# Altium PCB MEGA2560_Rev3e.PcbDoc (part 2 of 2)
Units mil, origin at the board's own origin, x right, y up, seen from the top; angles counter-clockwise.
Board outline 4000 x 2100 mil, 2 copper layers (Top, Bottom); 60 components, 84 nets, 364 pads, 139 vias.
Unrouted connection lines stored in the file: 1.
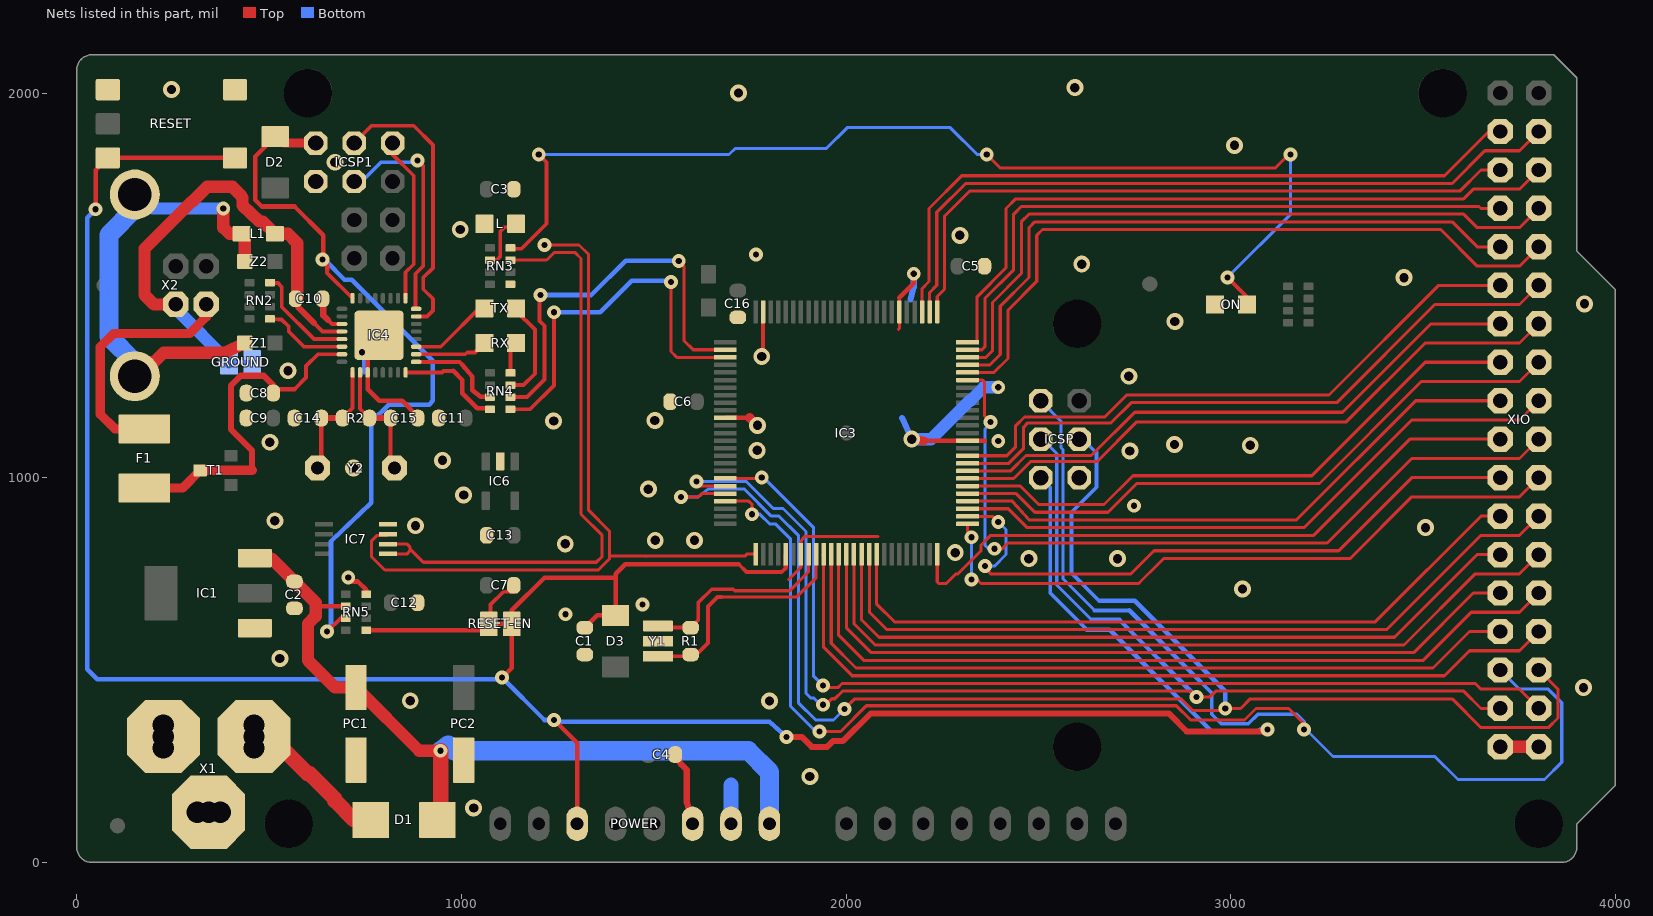
[diagram p2: the nets of this part, all layers, seen from the top]

## Via types
v1: diameter 36/36 (per signal layer), hole 16, Top to Bottom, 93 vias
v2: diameter 44/44 (per signal layer), hole 24, Top to Bottom, 46 vias

## Nets (pads, with @x,y where several pads share a name; then routed paths per layer and width w, separated by ;. In a path a pad name is that pad's centre, name@x,y a point inside that pad or via, vN(x,y) a via of type N, cw(c..) or ccw(c..) an arc to the next point about the centre after c; other vN are vias at no path point) (continued)
GND: C1.2 C2.2 C3.2 C4.2 C5.2 C6.2 C8.2 C9.2 C11.1 C12.1 C13.1 C14.2 C15.2 C16.2 GROUND.2 IC1.1 IC3.11 IC3.32 IC3.62 IC3.81 IC3.99 IC4.3 IC4.33 IC6.2 IC7.4 ICSP1.6 ICSP.6 L.C ON.C PC1.- PC2.- POWER.6 POWER.7 RESET.1 RESET.2 RN3.5 RN5.4 X1.1 X1.3 XIO.35 XIO.36 Y1.2 | length 2341.4
  Top w8: 1851.01,735.5 1883.01,767.5 IC3.32@1883.01,801.65 ; IC3.32@1882.9,801.54 IC3.32@1883.01,801.65 ; 2083.01,847.5 1892.01,847.5 1883.01,836.5 IC3.32@1883.01,801.65 ; 2136.01,1385.5 2138.81,1388.3 IC3.81@2138.81,1431.46 IC3.81@2140.05,1431.46 ; IC3.81@2137.01,1432.5 IC3.81@2140.05,1431.46 ; 2138.81,1468.3 2138.81,1432.7 IC3.81@2140.05,1431.46
  Top w10: v2(1781.01,1315.5) 1784.53,1319.02 1784.53,1365.46
  Top w11: IC4.33@756.41,1312.5 756.41,1313.9 756.51,1314 IC4.3@756.51,1272 ; 756.48,1230.03 IC4.3@756.48,1274.04 ; IC3.11@1686.05,1155.87 1686.05,1156 IC3.11@1688.38,1156 ; IC3.11@1688.38,1155.87 IC3.11@1688.38,1156 ; 1746.01,1156 IC3.11@1688.38,1156 ; IC3.99@1784.47,1431.46 1784.49,1407.43 1784.53,1365.46 ; 2209.01,1096.5 IC3.62@2316.29,1096.5 ; IC3.62@2317.01,1096.5 2316.7,1096.82 IC3.62@2315.97,1096.81 IC3.62@2316.29,1096.5 ; 2360.01,1096.5 IC3.62@2316.29,1096.5
  Top w12: IC1.1@463.01,609.5 IC1.1@466.01,610.5 ; v1(706.01,740.5) 716.01,730.5 731.01,730.5 752.58,708.93 RN5.4@752.58,697.74 ; IC4.33@756.41,1312.5 v1(742.01,1326.5) ; 756.48,1230.03 786.01,1200.5 846.01,1200.5 886.01,1160.5 C15.2@886.01,1155.5 ; IC4.33@756.48,1312.03 v1(742.01,1326.5) ; IC4.33@758.25,1326.5 v1(742.01,1326.5) ; IC4.33@786.01,1370.5 786.01,1312.5 v1(742.01,1326.5) ; 1749.01,1156.5 1746.01,1156 1747.01,1156.5 1750.01,1156.5 ; 2138.81,1468.3 2176.01,1505.5 v1(2176.01,1530.5) ; 2208.01,1097.5 2209.01,1096.5 ; 2360.01,1096.5 2361.01,1095.5
  Top w16: C4.2@1556.01,280.5 1571.01,255.5 1586.01,240.5 1586.01,155.5 POWER.6@1601.01,100.5 ; v2(2171.01,1100.5) 2206.01,1095.5 2208.01,1097.5
  Top w24: 1750.01,1156.5 v2(1770.01,1136.5) ; v2(2171.01,1100.5) 2201.01,1095.5
  Top w32: XIO.35@3701.01,300.5 XIO.36@3801.01,300.5
  Bottom w11: v1@747.01,1314.5 747.01,1274.5 757.01,1273.4 756.41,1273.4
  Bottom w12: 401.01,1300.5 GROUND.2@456.01,1300.5
  Bottom w16: v2(1770.01,1136.5) v2@1776.01,1145.5 ; 2146.01,1155.5 v2(2171.01,1100.5) ; 2168.01,1463.5 2176.01,1495.5 v1(2176.01,1530.5)
  Bottom w32: v2(2171.01,1100.5) 2221.01,1100.5 2321.01,1200.5 2323.01,1200.5 2358.01,1235.5 v1(2396.01,1235.5) ; XIO.35@3691.01,310.5 XIO.35@3701.01,300.5
  Bottom w40: POWER.7@1701.01,100.5 1701.01,200.5
  other v1: 1271.01,645.5 1471.01,670.5 2749.01,927.5 2396.01,1095.5 1766.01,1580.5
  other v2: 1032.01,141.5 1906.01,223.61 867.01,420.5 1801.01,419.61 3917.38,454.5 528.01,530.5 3031.01,710.82 2475.33,789.9 2705.55,789.9 2284.01,805.5 1270.01,828.5 1504.01,837.5 1606.01,837.5 3507.01,870.5 881.01,875.5 515.01,888.5 1006.01,955.5 1486.01,970.5 720.01,1025.5 951.01,1045.5 2738.01,1069.5 1769.01,1071.5 3051.01,1084.5 2854.01,1086.5 502.01,1092.5 1240.01,1147.5 1503.01,1149.13 2735.36,1264.18 549.01,1278.5 2855.01,1406.5 3920.38,1452.5 3451.01,1520.5 2613.01,1555.5 2296.01,1630.5 997.01,1645.5 671.01,1820.5 3010.01,1864.5 1720.38,2000.5 246.01,2009.5 2595.01,2014.5
L13: IC7.1 IC7.2 RN3.7 | length 1646.8
  Top w8: IC7.1@809.2,802.07 859.44,802.07 866.01,810.5 866.01,815.5 ; IC7.2@809.2,827.67 858.84,827.67 866.01,820.5 866.01,815.5 ; RN3.7@1127.58,1566.25 1221.76,1566.25 1241.01,1585.5 1296.01,1585.5 1311.01,1570.5 1311.01,905.5 1366.01,850.5 1366.01,795.5 1351.01,780.5 901.01,780.5 866.01,815.5
M8RXD: IC4.9 RN4.7 | length 250.9
  Top w10: IC4.9@882.47,1301.6 994.91,1301.6 1001.01,1295.5 ; RN4.7@1073.69,1210.5 RN4.7@1074.44,1209.75
  Top w12: 1001.01,1295.5 1028.14,1263.37 1028.14,1228.37 1051.01,1210.5 RN4.7@1073.69,1210.5
M8TXD: IC4.8 RN4.8 | length 282.9
  Top w10: IC4.8@854.91,1274.04 949.66,1274.04 953.56,1277.95 978.56,1277.95
  Top w12: 978.56,1277.95 1002.07,1254.44 1002.07,1219.44 1041.01,1180.5 1072.19,1180.5 RN4.8@1074.44,1178.26
MISO2: IC4.17 ICSP1.1 | length 435.1
  Top w10: ICSP1.1@821.01,1870.5 821.01,1840.5 876.01,1785.5 876.01,1555.5 854.91,1534.4 IC4.17@854.91,1466.96
MOSI2: IC4.16 ICSP1.4 | length 588.7
  Top w10: IC4.16@882.47,1439.4 882.47,1441.96 881.01,1445.5 881.01,1530.5 901.01,1550.5 901.01,1810.5 v1(886.01,1825.5)
  Bottom w10: ICSP1.4@721.01,1770.5 741.01,1770.5 791.01,1820.5 876.01,1820.5 881.01,1825.5 v1(886.01,1825.5)
NetL_A: L.A RN3.2 | length 141.7
  Top w10: RN3.2@1074.44,1566.25 1093.77,1568.26 1101.01,1575.5 1101.01,1640.5 1111.01,1650.5 L.A@1142.35,1660.5
NetON_A: ON.A RN3.8 | length 2829.5
  Top w8: v1(2366.01,1840.5) 2401.01,1805.5 3116.01,1805.5 3151.01,1840.5 v1(3156.01,1840.5) ; ON.A@3041.01,1460.5 ON.A@3042.35,1450.5
  Top w10: RN3.8@1127.58,1597.74 1138.33,1595.5 1156.01,1595.5 1221.01,1660.5 1221.01,1820.5 v1(1201.01,1840.5) ; v1(2991.64,1521.13) 3041.01,1471.76 ON.A@3041.01,1460.5
  Bottom w8: v1(1201.01,1840.5) 1696.01,1840.5 1712.01,1856.5 1949.01,1856.5 2003.01,1910.5 2271.01,1910.5 2341.01,1840.5 v1(2366.01,1840.5) ; v1(2991.64,1521.13) 3156.01,1685.5 v1(3156.01,1840.5)
NetRN4_3: RN4.3 TX.A | length 265.7
  Top w10: RN4.3@1127.58,1241.25 1161.76,1241.25 1191.01,1270.5 1191.01,1385.5 1142.35,1434.16 TX.A@1142.35,1440.5
NetRN4_4: RN4.4 RX.A | length 82.9
  Top w10: RN4.4@1127.58,1272.74 1127.58,1332.07 RX.A@1142.35,1350.5
PA0: IC3.78 XIO.3 | length 1844.4
  Top w8: IC3.78@2197.86,1431.46 2197.86,1492.35 2216.01,1510.5 2216.01,1700.5 2301.01,1785.5 3556.01,1785.5 3671.01,1900.5 XIO.3@3701.01,1900.5
PA1: IC3.77 XIO.4 | length 1918.7
  Top w8: IC3.77@2217.55,1431.46 2217.55,1482.04 2236.01,1500.5 2236.01,1690.5 2311.01,1765.5 3576.01,1765.5 3661.01,1850.5 3751.01,1850.5 XIO.4@3801.01,1900.5
PA2: IC3.76 XIO.5 | length 1751.5
  Top w8: IC3.76@2237.23,1431.46 2237.23,1471.72 2256.01,1490.5 2256.01,1680.5 2321.01,1745.5 3596.01,1745.5 3651.01,1800.5 XIO.5@3701.01,1800.5
PA3: IC3.75 XIO.6 | length 1829.6
  Top w8: IC3.75@2315.97,1352.72 2340.23,1352.72 2341.01,1359.5 2341.01,1471.13 2416.01,1546.13 2416.01,1700.5 2441.01,1725.5 3606.01,1725.5 3631.01,1750.5 3751.01,1750.5 XIO.6@3801.01,1800.5
PA4: IC3.74 XIO.7 | length 1699.6
  Top w8: IC3.74@2315.97,1333.04 2353.55,1333.04 2361.01,1340.5 2361.01,1466.13 2436.01,1541.13 2436.01,1685.5 2456.01,1705.5 3646.01,1705.5 3651.01,1700.5 XIO.7@3701.01,1700.5
PA5: IC3.73 XIO.8 | length 1826.7
  Top w8: IC3.73@2315.97,1313.35 2363.86,1313.35 2381.01,1330.5 2381.01,1456.13 2456.01,1531.13 2456.01,1665.5 2476.01,1685.5 3606.01,1685.5 3641.01,1650.5 3751.01,1650.5 XIO.8@3801.01,1700.5
PA6: IC3.72 XIO.9 | length 1715.4
  Top w8: IC3.72@2315.97,1293.67 2374.18,1293.67 2401.01,1320.5 2401.01,1446.13 2476.01,1521.13 2476.01,1650.5 2491.01,1665.5 3576.01,1665.5 3641.01,1600.5 XIO.9@3701.01,1600.5
PA7: IC3.71 XIO.10 | length 1842.5
  Top w8: IC3.71@2315.97,1273.98 2384.49,1273.98 2421.01,1310.5 2421.01,1436.13 2496.01,1511.13 2496.01,1630.5 2511.01,1645.5 3546.01,1645.5 3641.01,1550.5 3751.01,1550.5 XIO.10@3801.01,1600.5
PB0: IC3.19 XIO.34 | length 2613.4
  Top w8: IC3.19@1686.05,998.39 1788.12,998.39 v1(1781.01,1000.5) ; v1(1940,460) 1945.36,454.64 1978.94,454.64 1989.8,465.5 3636.01,465.5 3651.01,450.5 3751.01,450.5 XIO.34@3801.01,400.5
  Bottom w8: v1(1781.01,1000.5) 1786.01,1000.5 1916.01,870.5 1916.01,483.99 v1(1940,460)
PB1: IC3.20 ICSP.3 XIO.33 | length 3585.7
  Top w8: v1(1611.01,990.5) 1622.81,978.7 IC3.20@1686.05,978.7 ; v1(1940,410) 1947.58,410 1963.16,425.58 1971.09,425.58 1991.01,445.5 2896.01,445.5 v1(2911.01,430.5) 2946.01,430.5 2961.01,445.5 3606.01,445.5 3651.01,400.5 XIO.33@3701.01,400.5
  Bottom w8: v1(1611.01,990.5) 1741.01,990.5 1811.01,920.5 1836.01,920.5 1896.01,860.5 1896.01,439.59 1908.13,427.48 1916.46,427.48 1933.94,410 v1(1940,410) ; ICSP.3@2511.01,1100.5 2548.01,1063.5 2548.01,721.3 2638.81,630.5
  Bottom w10: ICSP.3@2506.01,1100.5 ICSP.3@2511.01,1100.5
  Bottom w12: 2638.81,630.5 2711.01,630.5 v1(2911.01,430.5)
PB2: IC3.21 ICSP.4 XIO.32 | length 4115.2
  Top w8: v1(1571.01,950.5) 1616.01,950.5 1624.53,959.02 IC3.21@1686.05,959.02 ; v1(1996.01,399.12) 2022.39,425.5 2871.01,425.5 2901.01,395.5 2981.01,395.5 v1(2986.01,400.5) 3026.01,400.5 3051.01,425.5 3576.01,425.5 3651.01,350.5 3826.01,350.5 3851.01,375.5 3851.01,450.5 XIO.32@3801.01,500.5
  Bottom w8: v1(1571.01,950.5) 1616.01,950.5 1641.01,970.5 1736.01,970.5 1806.01,900.5 1826.01,900.5 1876.01,850.5 1876.01,415.5 1921.01,370.5 1967.39,370.5 v1(1996.01,399.12) ; ICSP.4@2606.01,1100.5 2616.01,1100.5 2651.01,1065.5
  Bottom w10: 2651.01,1065.5 2651.01,975.5 2586.01,910.5 2586.01,752.67 2658.18,680.5
  Bottom w12: 2658.18,680.5 2751.01,680.5 2986.01,445.5 v1(2986.01,400.5)
PB3: IC3.22 ICSP.1 XIO.31 | length 4543.3
  Top w8: IC3.22@1686.05,939.33 1747.18,939.33 1756.01,930.5 v1(1756.01,905.5) ; v1(1931.01,340.5) 1986.01,340.5 2053.01,407.5 2859.01,407.5 2896.01,370.5 3036.01,370.5 3066.01,400.5 3151.01,400.5 3191.01,360.5 v1(3191.01,345.5)
  Bottom w8: v1(1756.01,905.5) 1776.01,905.5 1801.01,880.5 1816.01,880.5 1856.01,840.5 1856.01,405.5 1921.01,340.5 v1(1931.01,340.5) ; ICSP.1@2506.01,1200.5 2559.01,1147.5 2559.01,1078.5 2564.01,1073.5 2564.01,737.5 2577.01,724.5 2646.01,655.5 ; v1(3191.01,345.5) 3196.01,345.5 3266.01,275.5 3531.01,275.5 3591.01,215.5 3816.01,215.5 3861.01,260.5 3861.01,415.5 3826.01,450.5 3751.01,450.5 XIO.31@3701.01,500.5
  Bottom w10: 2646.01,655.5 2736.01,655.5 ; 2921.01,470.5 2951.01,440.5 2951.01,385.5 2976.01,360.5 3046.01,360.5 3071.01,385.5 3171.01,385.5 3191.01,365.5 v1(3191.01,345.5)
  Bottom w12: 2736.01,655.5 2921.01,470.5
PB7: IC3.26 IC7.3 | length 2058.1
  Top w8: IC7.3@809.2,853.26 806.44,850.5 781.01,850.5 766.01,835.5 766.01,795.5 801.01,760.5 1356.01,760.5 1384.97,789.46 1384.97,796.54 ; v1(1216.01,1605.5) 1306.01,1605.5 1331.01,1580.5 1331.01,915.5 1384.97,861.54 1384.97,796.54 ; 1479.97,795.5 1481.01,796.54 ; IC3.26@1764.79,801.54 1742.01,801.5 1737.05,796.54 1481.01,796.54 ; 1384.97,796.54 1481.01,796.54
PC0: IC3.53 XIO.18 | length 1642.1
  Top w8: IC3.53@2315.97,919.65 2421.86,919.65 2471.01,870.5 3191.01,870.5 3471.01,1150.5 3751.01,1150.5 XIO.18@3801.01,1200.5
PC1: IC3.54 XIO.17 | length 1535.2
  Top w8: IC3.54@2315.97,939.33 2432.18,939.33 2476.01,890.5 3171.01,890.5 3481.01,1200.5 XIO.17@3701.01,1200.5
PC2: IC3.55 XIO.16 | length 1666.7
  Top w8: IC3.55@2315.97,959.02 2442.49,959.02 2491.01,910.5 2681.01,910.5 2756.01,985.5 3231.01,985.5 3496.01,1250.5 3751.01,1250.5 XIO.16@3801.01,1300.5
PC3: IC3.56 XIO.15 | length 1558.3
  Top w8: IC3.56@2315.97,978.7 2452.81,978.7 2501.01,930.5 2671.01,930.5 2746.01,1005.5 3211.01,1005.5 3506.01,1300.5 XIO.15@3701.01,1300.5
PC4: IC3.57 XIO.14 | length 1651.6
  Top w8: IC3.57@2315.97,998.39 2436.01,998.5 2481.01,1043 2654.01,1043 2756.01,1145.5 3301.01,1145.5 3506.01,1350.5 3751.01,1350.5 XIO.14@3801.01,1400.5
PC5: IC3.58 XIO.13 | length 1543.4
  Top w8: IC3.58@2315.97,1018.07 2428.58,1018.07 2468.01,1058 2638.01,1058 2751.01,1170.5 3291.01,1170.5 3521.01,1400.5 XIO.13@3701.01,1400.5
PC6: IC3.59 XIO.12 | length 1708.9
  Top w8: IC3.59@2315.97,1037.76 2423.27,1037.76 2461.01,1075.5 2461.01,1130.5 2473.01,1143 2689.01,1143 2742.01,1195.5 3276.01,1195.5 3531.01,1450.5 3751.01,1450.5 XIO.12@3801.01,1500.5
PC7: IC3.60 XIO.11 | length 1600.8
  Top w8: IC3.60@2315.97,1057.44 2417.95,1057.44 2441.01,1080.5 2441.01,1135.5 2464.01,1158 2673.01,1158 2730.01,1215.5 3256.01,1215.5 3541.01,1500.5 XIO.11@3701.01,1500.5
PD7: IC3.50 XIO.19 | length 1702.3
  Top w8: IC3.50@2237.23,801.54 2237.23,729.28 2241.01,725.5 2261.01,725.5 2286.01,750.5 2291.01,750.5 2351.01,810.5 2351.01,825.5 2375.01,849.5 2375.01,850.5 3216.01,850.5 3466.01,1100.5 XIO.19@3701.01,1100.5
PE0: IC3.2 RN4.2 | length 1061
  Top w8: v1(1565.01,1563.5) 1565.01,1562.5 1567.01,1562.5 1579.01,1550.5 1579.01,1356.5 1602.47,1333.04 IC3.2@1686.05,1333.04
  Top w10: RN4.2@1127.58,1209.75 1128.33,1210.5 1171.01,1210.5 1216.01,1255.5 1216.01,1395.5 1203.25,1407.74 1203.25,1472.74 v1(1206.01,1475.5)
  Bottom w12: v1(1206.01,1475.5) 1338.01,1475.5 1427.01,1564.5 1564.01,1564.5 v1(1565.01,1563.5)
PE1: IC3.3 RN4.1 | length 996.7
  Top w8: v1(1545.01,1509.5) 1545.01,1328.5 1560.16,1313.35 IC3.3@1686.05,1313.35
  Top w10: RN4.1@1127.58,1178.26 1178.77,1178.26 1241.01,1240.5 v1(1241.01,1430.5)
  Bottom w12: v1(1241.01,1430.5) 1361.01,1430.5 1443.01,1512.5 1542.01,1512.5 v1(1545.01,1509.5)
PG0: IC3.51 XIO.22 | length 1740.9
  Top w8: IC3.51@2315.97,880.28 2315.97,860.54 v1(2326.01,845.5) ; v1(2326.01,735.5) 2341.01,735.5 2351.01,725.5 2761.01,725.5 2771.01,735.5 2806.01,770.5 2826.01,790.5 3311.01,790.5 3471.01,950.5 3751.01,950.5 XIO.22@3801.01,1000.5
  Bottom w8: v1(2326.01,735.5) v1(2326.01,845.5)
PG1: IC3.52 XIO.21 | length 1701.2
  Top w8: IC3.52@2315.97,899.96 2380.47,899.96 v1(2396.01,885.5) ; v1(2361.01,770.5) 2361.01,765.5 2376.01,750.5 2741.01,750.5 2801.01,810.5 3281.01,810.5 3471.01,1000.5 XIO.21@3701.01,1000.5
  Bottom w8: v1(2361.01,770.5) 2386.01,770.5 2416.01,800.5 2416.01,865.5 v1(2396.01,885.5)
PG2: IC3.70 XIO.20 | length 2043.8
  Top w8: IC3.70@2315.97,1254.3 2355.21,1254.3 2360.01,1249.5 2360.01,1161.5 v1(2376.01,1145.5) ; v1(2386.01,815.5) 2406.01,815.5 2421.01,830.5 3251.01,830.5 3471.01,1050.5 3751.01,1050.5 XIO.20@3801.01,1100.5
  Bottom w8: v1(2376.01,1145.5) 2361.01,1125.5 2361.01,825.5 2371.01,815.5 v1(2386.01,815.5)
PL0: IC3.35 XIO.30 | length 2180.3
  Top w8: IC3.35@1941.01,799.5 1941.01,560.5 2016.01,485.5 3556.01,485.5 3621.01,550.5 3751.01,550.5 XIO.30@3801.01,600.5
  Top w10: IC3.35@1941.01,799.5 1942.01,800.5 IC3.35@1941.95,801.54 IC3.35@1941.95,801.54
PL1: IC3.36 XIO.29 | length 2037.1
  Top w8: IC3.36@1961.64,801.54 1961.64,569.87 2026.01,505.5 3526.01,505.5 3621.01,600.5 XIO.29@3701.01,600.5
PL2: IC3.37 XIO.28 | length 2130.9
  Top w8: IC3.37@1981.32,801.54 1981.33,799.82 1981.01,799.5 1981.01,590.5 2046.01,525.5 3501.01,525.5 3626.01,650.5 3751.01,650.5 XIO.28@3801.01,700.5
  Top w10: IC3.37@1981.05,801.54 IC3.37@1981.32,801.54
PL3: IC3.38 XIO.27 | length 1982.2
  Top w8: IC3.38@2001.01,801.54 2001.01,610.5 2066.01,545.5 3476.01,545.5 3631.01,700.5 XIO.27@3701.01,700.5
PL4: IC3.39 XIO.26 | length 2081.3
  Top w8: IC3.39@2020.7,798.82 2020.7,796.82 2021.01,796.5 2021.01,620.5 2076.01,565.5 3451.01,565.5 3636.01,750.5 3751.01,750.5 XIO.26@3801.01,800.5
  Top w10: IC3.39@2020.7,798.82 IC3.39@2020.7,801.54
PL5: IC3.40 XIO.25 | length 1939
  Top w8: IC3.40@2040.38,801.54 2040.38,631.13 2086.01,585.5 3426.01,585.5 3641.01,800.5 XIO.25@3701.01,800.5
PL6: IC3.41 XIO.24 | length 2033.2
  Top w8: IC3.41@2060.07,801.54 2061.01,800.59 2061.01,650.5 2106.01,605.5 3406.01,605.5 3651.01,850.5 3751.01,850.5 XIO.24@3801.01,900.5
  Top w10: IC3.41@2060.07,800.56 IC3.41@2060.07,801.54
PL7: IC3.42 XIO.23 | length 1884.1
  Top w8: IC3.42@2079.75,801.54 2079.75,671.76 2126.01,625.5 3376.01,625.5 3651.01,900.5 XIO.23@3701.01,900.5
PWRIN: D1.A X1.2 | length 396.2
  Top w40: X1.2@461.01,327.5 488.01,300.5 531.01,300.5 601.01,230.5 606.01,230.5 671.01,165.5 671.01,160.5 721.01,110.5 D1.A@764.4,110.5
RD+: IC4.29 RN2.4 | length 278.4
  Top w10: RN2.4@502.58,1507.74 503.83,1506.5 523.01,1506.5 533.01,1496.5 533.01,1444.5 616.85,1360.66 IC4.29@689.55,1360.66
RD-: IC4.30 RN2.1 | length 224.1
  Top w10: RN2.1@502.58,1413.26 523.81,1412.04 532.55,1412.04 551.01,1393.57 551.01,1380.5 590.54,1340.97 IC4.30@689.55,1340.97
RESET: C1.1 C7.2 D3.A IC3.30 ICSP.5 POWER.3 RESET-EN.1 RESET-EN.2 RESET.3 RESET.4 RN5.1 | length 7953.3
  Top w10: RESET-EN.1@1071.01,620.5 1076.01,625.5 1076.01,670.5 1109.47,703.96 C7.2@1134.47,703.96 ; 1721.01,775.5 1741.01,755.5 1833.01,755.5 1843.53,766.02
  Top w11: 1843.53,766.02 IC3.30@1843.53,801.54
  Top w12: v1(49.01,1698.5) 49.01,1800.31 RESET.3@80.66,1831.96 81.2,1832.5 410.82,1832.5 RESET.4@411.36,1831.96 ; RN5.1@753.01,602.83 RN5.1@752.58,603.26 1053.77,603.26 RESET-EN.1@1071.01,620.5 ; RESET-EN.1@1076.01,605.5 RESET-EN.1@1071.01,620.5 ; v1(1106.01,480.5) 1131.01,505.5 RESET-EN.2@1131.01,620.5 ; C7.2@1134.47,703.96 C7.2@1136.01,720.5 ; v1(1241.01,370.5) 1301.01,310.5 POWER.3@1301.01,100.5 ; C1.1@1321.01,610.5 1352.94,642.43 D3.A@1401.01,642.43 1401.01,740.5 ; 1721.01,775.5 1426.01,775.5 1401.01,750.5 1401.01,740.5 ; RESET-EN.1@1071.01,620.5 RESET-EN.2@1131.01,620.5 ; RESET-EN.2@1131.01,620.5 1131.01,655.5 1216.01,740.5 1401.01,740.5
  Top w16: RESET.4@411.36,1831.96 RESET.4@413.01,1831.96 ; v1(1845.7,325.82) 1886.01,325.5 1911.01,300.5 1951.01,300.5 1966.01,315.5 1991.01,315.5 2065.01,387.5 2839.01,387.5 2886.01,340.5 3091.01,340.5 v1(3096.01,345.5)
  Bottom w10: ICSP.5@2511.01,995.5 2531.01,975.5 2531.01,700.5 2626.01,605.5
  Bottom w12: v1(49.01,1698.5) 27.01,1676.5 27.01,502.5 53.01,476.5 1102.01,476.5 v1(1106.01,480.5) 1216.01,370.5 v1(1241.01,370.5) 1246.01,365.5 1801.01,365.5 v1(1845.7,325.82) ; ICSP.5@2506.01,1000.5 ICSP.5@2511.01,995.5 ; 2626.01,605.5 2686.01,605.5 2951.01,340.5 3071.01,340.5 3076.01,345.5 v1(3096.01,345.5)
RESET2: D2.A IC4.24 ICSP1.5 RN5.7 | length 2093.8
  Top w10: v1(651.01,600.5) 685.26,634.75 RN5.7@699.44,634.75 ; 651.01,1540.5 651.01,1533.06 IC4.24@717.11,1466.96
  Top w12: D2.A@516.01,1887.43 464.01,1835.43 464.01,1722.5 481.01,1705.5 566.01,1705.5 641.01,1630.5 641.01,1565.5 v1(638.51,1568) 651.01,1555.5 651.01,1540.5 ; ICSP1.5@591.01,1870.5 ICSP1.5@621.01,1870.5 ; v1(651.01,600.5) v1@653.77,603.26
  Top w24: D2.A@516.01,1887.43 537.94,1870.5 ICSP1.5@621.01,1870.5
  Bottom w12: v1(638.51,1568) 648.51,1563 696.01,1515.5 715.44,1515.5 926.01,1304.93 926.01,1200.5 916.01,1190.5 811.01,1190.5 766.01,1145.5 766.01,935.5 661.01,835.5 661.01,600.5 v1(651.01,600.5)
RXL: IC4.10 RX.C | length 189.3
  Top w10: IC4.10@882.47,1321.29 1010.22,1321.29 1015.22,1326.29 1035.46,1326.29
  Top w12: 1035.46,1326.29 RX.C@1059.67,1350.5
SCK2: IC4.15 ICSP1.3 | length 745.1
  Top w10: ICSP1.3@721.01,1870.5 766.01,1915.5 876.01,1915.5 926.01,1865.5 926.01,1545.5 901.01,1520.5 901.01,1490.5 926.01,1465.5 926.01,1435.5 910.22,1419.71 IC4.15@882.47,1419.71
TXL: IC4.11 TX.C | length 229.6
  Top w10: IC4.11@882.47,1340.97 946.48,1340.97 1056.01,1450.5 TX.C@1059.67,1440.5
UGND: C10.2 GROUND.1 IC4.28 L1.1 X2.4 | length 1268.2
  Top w10: 617.01,1402.5 639.17,1380.34 IC4.28@689.55,1380.34
  Top w16: C10.2@569.01,1465.5 575.01,1459.5 575.01,1444.5 617.01,1402.5
  Top w32: X2.4@257.7,1451.29 256.92,1450.5 201.01,1450.5 176.01,1475.5 176.01,1595.5 299.01,1718.5 301.01,1718.5 339.01,1756.5 405.01,1756.5 427.01,1734.5 427.01,1732.5 431.01,1728.5 431.01,1708.5 475.01,1666.5 483.32,1666.5 L1.1@515.32,1634.5 549.01,1634.5 573.01,1610.5 573.01,1469.5 C10.2@569.01,1465.5
  Bottom w32: X2.4@257.7,1451.29 257.7,1438.81 GROUND.1@396.01,1300.5
USBVCC: C8.1 F1.1 IC4.31 T1.1 | length 931.3
  Top w10: 566.01,1230.5 596.01,1260.5 596.01,1290.5 626.8,1321.29 IC4.31@689.55,1321.29
  Top w12: C8.1@511.01,1220.5 521.01,1230.5 566.01,1230.5
  Top w16: 456.01,1019.5 456.01,1070.5 401.01,1125.5 401.01,1240.5 426.01,1265.5 486.01,1265.5 511.01,1240.5 C8.1@511.01,1220.5
  Top w24: F1.1@176.01,973.73 275.24,973.73 T1.1@321.01,1019.5 456.01,1019.5
USHIELD: L1.2 X2.P$1 X2.P$2 Z1.1 Z2.1 | length 1338.8
  Top w16: L1.2@428.7,1628.19 L1.2@428.7,1634.5
  Top w32: X2.P$2@151.01,1264.28 151.01,1300.5 201.01,1300.5 226.01,1325.5 386.64,1325.5 Z1.1@436.64,1350.5 ; X2.P$1@151.01,1736.72 X2.P$1@182.79,1768.5 ; v1(381.01,1700.5) 381.01,1650.5 397.01,1634.5 L1.2@428.7,1634.5 436.64,1626.56 Z2.1@436.64,1562.5
  Bottom w32: X2.P$1@151.01,1736.72 197.23,1700.5 v1(381.01,1700.5)
  Bottom w50: X2.P$2@151.01,1264.28 151.01,1300.5 84.01,1367.5 84.01,1631.5 151.01,1700.5 X2.P$1@151.01,1736.72
VIN: C2.1 D1.C IC1.3 PC1.+ POWER.8 RN5.6 | length 2096.4
  Top w8: IC1.3@463.01,791.5 IC1.3@464.25,790.26
  Top w12: 621.01,675.5 630.26,666.25 RN5.6@699.44,666.25
  Top w32: IC1.3@464.25,790.26 506.25,790.26 C2.1@566.01,730.5 621.01,675.5 621.01,640.5 601.01,620.5 601.01,525.5 671.52,454.99 PC1.+@726.01,454.99 890.5,290.5 v1(946.01,290.5)
  Top w40: D1.C@937.62,110.5 946.01,118.89 v1(946.01,290.5)
  Bottom w50: v1(946.01,290.5) 966.01,305.5 981.01,290.5 1746.01,290.5 1801.01,235.5 POWER.8@1801.01,100.5
VUCAP: C10.1 IC4.27 | length 101.7
  Top w10: 653.01,1410.5 663.48,1400.03 IC4.27@689.55,1400.03
  Top w16: C10.1@639.01,1465.5 641.01,1463.5 641.01,1422.5 653.01,1410.5
XT1: C14.1 IC4.1 R2.1 Y2.2 | length 329.4
  Top w10: R2.1@701.9,1155.5 R2.1@691.01,1155.5 717.11,1181.6 IC4.1@717.11,1274.04
  Top w12: Y2.2@626.01,1025.5 636.01,1035.5 C14.1@636.01,1155.5
  Top w16: C14.1@636.01,1155.5 R2.1@691.01,1155.5
XT2: C15.1 IC4.2 R2.2 Y2.1 | length 317.7
  Top w10: IC4.2@736.8,1274.04 736.8,1179.71 R2.2@761.01,1155.5 ; C15.1@816.01,1155.5 816.01,1035.5 Y2.1@826.01,1025.5
  Top w16: R2.2@761.01,1155.5 C15.1@816.01,1155.5
XTAL1: IC3.34 R1.1 Y1.3 | length 611.2
  Top w8: 1676.01,690.5 1872.27,690.5 1922.27,740.5 IC3.34@1922.27,801.54
  Top w10: Y1.3@1511.01,536.13 1571.64,536.13 R1.1@1596.01,540.5 1611.01,540.5 1641.01,570.5 1641.01,665.5 1666.01,690.5 1676.01,690.5
XTAL2: IC3.33 R1.2 Y1.1 | length 581
  Top w8: 1706.01,710.5 1710.01,706.5 1853.58,706.5 1902.58,755.5 IC3.33@1902.58,801.54
  Top w10: Y1.1@1490.38,614.87 Y1.1@1511.01,614.87 1495.38,614.87 1499.75,610.5 R1.2@1596.01,610.5 1616.01,630.5 1616.01,675.5 1651.01,710.5 1706.01,710.5
XVCC: F1.2 X2.1 | length 647.2
  Top w24: F1.2@176.01,1127.27 99.24,1127.27 61.01,1165.5 61.01,1340.5 96.01,1375.5 294.01,1375.5 337.01,1418.5 337.01,1450.72 X2.1@336.44,1451.29
pads on no net: FD1.P$1 FD2.P$1 FD3.P$1 FD4.P$1 IC3.1 IC3.4 IC3.5 IC3.6 IC3.7 IC3.8 IC3.9 IC3.12 IC3.13 IC3.14 IC3.15 IC3.16 IC3.17 IC3.18 IC3.23 IC3.24 IC3.25 IC3.27 IC3.28 IC3.29 IC3.43 IC3.44 IC3.45 IC3.46 IC3.47 IC3.48 IC3.49 IC3.63 IC3.64 IC3.65 IC3.66 IC3.67 IC3.68 IC3.69 IC3.79 IC3.82 IC3.83 IC3.84 IC3.85 IC3.86 IC3.87 IC3.88 IC3.89 IC4.5 IC4.6 IC4.7 IC4.12 IC4.14 IC4.22 IC4.23 IC4.25 IC4.26 IC6.4 POWER.1 RESET.5 RN1.1 RN1.2 RN1.3 RN1.4 RN1.5 RN1.6 RN1.7 RN1.8 RN2.2 RN2.3 RN2.6 RN2.7 RN3.3 RN3.6 X1.4 X1.5 X1.6 X1.7 X1.8 X1.9
copper on no net: | length 11272.7
  Top w8: v1(1632.01,1706.5) v1(1770.01,1706.5) ; v1(1632.01,1753.5) v1(1770.01,1753.5) ; 2099.44,801.54 2099.44,682.07 2136.01,645.5 2941.01,645.5 2956.01,660.5 v1(2966.01,665.5) ; 2119.12,801.54 2119.12,793.61 2119.01,789.5 2119.51,788 2119.51,693 2146.01,665.5 2886.01,665.5 v1(2916.01,695.5) ; 2138.81,801.54 2139.97,801.54 2139.51,803 2139.51,723 2178.01,683.5 2834.01,683.5 v1(2861.01,705.5) ; 2158.49,801.54 2158.49,798.02 2159.01,798 2159.01,738 2191.01,705.5 2786.01,705.5 v1(2836.01,755.5) ; v1(2196.01,1170.5) 2196.01,1160.5 2241.01,1115.5 2316.01,1115.5 2315.97,1116.5 ; v1(2196.01,1255.5) 2256.01,1195.5 2256.01,1150.5 2271.01,1135.5 2306.01,1135.5 2310.33,1136.19 2315.97,1136.19
  Top w10: 3171.76,1466.25 3176.01,1470.5 3176.01,1530.5
  Top w12: v1(3101.01,1535.5) 3101.01,1450.5 3116.01,1435.5 3148.69,1435.5 3149.44,1434.75 ; 3149.44,1466.25 3171.76,1466.25 ; 3176.01,1530.5 3186.01,1540.5 v1(3206.01,1540.5)
  Bottom w8: v1(1770.01,1706.5) 1795.01,1706.5 1873.01,1784.5 1995.01,1784.5 2031.01,1820.5 2206.01,1820.5 2276.01,1750.5 2406.01,1750.5 2556.01,1900.5 2641.01,1900.5 2786.01,1755.5 2786.01,710.5 2856.01,640.5 2941.01,640.5 v1(2966.01,665.5) 2961.01,670.5 2961.01,1350.5 3151.01,1540.5 v1(3206.01,1540.5) ; v1(1770.01,1753.5) 1797.01,1753.5 1846.01,1802.5 1983.01,1802.5 2026.01,1845.5 2221.01,1845.5 2296.01,1770.5 2401.01,1770.5 2551.01,1920.5 2646.01,1920.5 2806.01,1760.5 2806.01,715.5 2861.01,660.5 2906.01,660.5 2916.01,670.5 v1(2916.01,695.5) 2916.01,720.5 2941.01,745.5 2941.01,1375.5 v1(3101.01,1535.5)
  other v1: 1861.01,1890.5

## Polygon pours and split planes (outlines as drawn)
GND on Top "Polygon_1_Net_GND" (solid, remove dead copper, pour order 2): 10.04,2079.5 4005.01,2079.5 4005.01,21.5 22.01,21.5 22.01,1179.5 422,1179.5 420.02,1803.5 7.98,1803.5
+5V on Top "Polygon_1_Net_+5V" (solid, remove dead copper, pour order 0): 382.01,519.5 382.01,1181.5 20.01,1181.5 20.01,519.5
GND on Bottom "Polygon_2_Net_GND" (solid, remove dead copper, pour order 3): 22.04,2079.5 4002.67,2079.5 4030.01,2052.16 4030.01,21.5 49.35,21.5 22.01,48.84 22.01,1179.5 422,1179.5 420.02,1817.5 19.98,1817.5
+5V on Bottom "Polygon_2_Net_+5V" (solid, remove dead copper, pour order 1): 53.01,519.5 53.01,1181.5 432.01,1181.5 432.01,519.5

## Keep-outs
Top:
  region: 1675.01,1464.5 1675.01,1472.5 1689.01,1472.5 1689.01,1464.5
Bottom:
  lines w10: 3971.01,510.5 3879.01,510.5 3879.01,1278.5 3983.01,1278.5
Keep-Out Layer:
  the board outline again, w10

## Silkscreen, mask and mechanical layers (free items; w line width, h text height)
Top Overlay:
  drawing of 36 lines, arcs and shapes, not listed
  text "5V" at 3618.7,2048.11 h37.4
  text "GND" at 1080.26,1790.98 h47.6 r90
  text "AREF" at 974.84,1739.98 h47.6 r90
  text "1" at 2446.52,1187.53 h42.5
  text "DIGITAL" at 3526.01,925.5 h56.1 r90
  text "Arduino" at 1976.01,550.5 h93.5
  text "MEGA 2560" at 1976.01,400.5 h106.25
  text "PC2" at 946.01,345.5 h42.5
  text "PC1" at 671.01,340.5 h42.5
  text "ANALOG   IN" at 2176.01,290.5 h56.1
  text "GND" at 3841.01,200.5 h47.6
  text "5V" at 1460.49,168.67 h47.6
  text "GND" at 1580.49,168.67 h47.6
  text "VIN" at 1752.49,168.67 h47.6
  text "IOREF" at 1224.84,167.98 h47.6 r90
  text "RESET" at 1329.84,167.98 h47.6 r90
  text "3V3" at 1429.84,167.98 h47.6 r90
Dimension:
  the board outline again, w10
tPlace:
  circle w12: c876.01,1910.5 r7.07
  lines w12: 2861.01,320.5 3546.01,320.5 3581.01,285.5 ; 3286.01,1615.5 3356.01,1615.5 3401.01,1660.5 ; 3496.01,905.5 3496.01,445.5 3536.01,405.5 ; 3496.01,1320.5 3496.01,1860.5 3536.01,1900.5 ; 3701.01,225.5 3701.01,205.5 3801.01,205.5 3801.01,225.5 ; 3701.01,2050.5 3701.01,2075.5 3801.01,2075.5 3801.01,2050.5
  text "22" at 3551.01,1875.5 h47.6
  text "24" at 3551.01,1775.5 h47.6
  text "26" at 3551.01,1675.5 h47.6
  text "28" at 3551.01,1575.5 h47.6
  text "30" at 3551.01,1475.5 h47.6
  text "31" at 3876.01,1475.5 h47.6
  text "32" at 3551.01,1375.5 h47.6
  text "33" at 3876.01,1375.5 h47.6
  text "34" at 3551.01,1275.5 h47.6
  text "35" at 3876.01,1275.5 h47.6
  text "36" at 3551.01,1175.5 h47.6
  text "37" at 3876.01,1175.5 h47.6
  text "38" at 3551.01,1075.5 h47.6
  text "39" at 3876.01,1075.5 h47.6
  text "40" at 3551.01,975.5 h47.6
  text "41" at 3876.01,975.5 h47.6
  text "42" at 3551.01,875.5 h47.6
  text "43" at 3876.01,875.5 h47.6
  text "Arduino.org" at 2421.01,800.5 h73.1
  text "44" at 3551.01,775.5 h47.6
  text "45" at 3876.01,775.5 h47.6
  text "46" at 3551.01,675.5 h47.6
  text "47" at 3876.01,675.5 h47.6
  text "TM" at 2616.01,605.5 h34
  text "48" at 3551.01,575.5 h47.6
  text "49" at 3876.01,575.5 h47.6
  text "50" at 3551.01,475.5 h47.6
  text "51" at 3876.01,475.5 h47.6
  text "52" at 3551.01,375.5 h47.6
  text "53" at 3876.01,375.5 h47.6
  text "0" at 2031.01,185.5 h47.6 r90
  text "1" at 2121.01,185.5 h47.6 r90
  text "2" at 2231.01,185.5 h47.6 r90
  text "3" at 2331.01,185.5 h47.6 r90
  text "4" at 2431.01,185.5 h47.6 r90
  text "5" at 2526.01,185.5 h47.6 r90
  text "6" at 2626.01,185.5 h47.6 r90
  text "7" at 2731.01,185.5 h47.6 r90
ReferenceLC:
  text "L" at 1196.01,1630.5 h42.5
  text "ON" at 2851.2,1434.01 h42.5
  text "TX" at 1176.01,1415.5 h42.5
  text "RX" at 1176.01,1325.5 h42.5
test-probe:
  lines w12: 621.01,1870.5 691.01,1940.5 1171.01,1940.5 1171.01,1750.5 ; 721.01,1870.5 761.01,1910.5 1071.01,1910.5 1071.01,1750.5 ; 821.01,1870.5 971.01,1870.5 971.01,1750.5
  text "SCL" at 771.01,2130.5 h93 r90
  text "SDA" at 871.01,2130.5 h93 r90
  text "AREF" at 971.01,2130.5 h93 r90
  text "GND3" at 1071.01,2130.5 h93 r90
  text "13" at 1171.01,2130.5 h93 r90
  text "12" at 1271.01,2130.5 h93 r90
  text "11" at 1371.01,2130.5 h93 r90
  text "10" at 1471.01,2130.5 h93 r90
  text "9" at 1571.01,2130.5 h93 r90
  text "8" at 1671.01,2130.5 h93 r90
  text "7" at 1831.01,2130.5 h93 r90
  text "6" at 1931.01,2130.5 h93 r90
  text "5" at 2031.01,2130.5 h93 r90
  text "4" at 2131.01,2130.5 h93 r90
  text "3" at 2231.01,2130.5 h93 r90
  text "2" at 2331.01,2130.5 h93 r90
  text "1" at 2431.01,2130.5 h93 r90
  text "0" at 2531.01,2130.5 h93 r90
  text "14" at 2731.01,2130.5 h93 r90
  text "15" at 2831.01,2130.5 h93 r90
  text "16" at 2931.01,2130.5 h93 r90
  text "17" at 3031.01,2130.5 h93 r90
  text "18" at 3131.01,2130.5 h93 r90
  text "19" at 3231.01,2130.5 h93 r90
  text "20" at 3331.01,2130.5 h93 r90
  text "21" at 3431.01,2130.5 h93 r90
  text "5V_2" at 3481.75,2001.48 h93
  text "5V_3" at 3931.01,2001.48 h93
  text "23" at 3931.01,1880.22 h93
  text "22" at 3569.3,1879.01 h93
  text "25" at 3931.01,1780.22 h93
  text "24" at 3569.3,1779.01 h93
  text "26" at 3566.55,1680.22 h93
  text "27" at 3931.01,1679.01 h93
  text "USB1_D+" at 281.01,1600.5 h93 r90
  text "USB1_D-" at 371.01,1600.5 h93 r90
  text "28" at 3568.61,1580.22 h93
  text "29" at 3931.01,1580.22 h93
  text "30" at 3569.56,1480.22 h93
  text "31" at 3931.01,1480.22 h93
  text "ISP2_4" at 720.03,1464.12 h93 r90
  text "ISP2_2" at 820.03,1464.12 h93 r90
  text "ISP2_1" at 970.03,1463.43 h93 r90
  text "ISP2_3" at 1070.03,1462.4 h93 r90
  text "ISP2_5" at 1170.03,1462.4 h93 r90
  text "ISP2_6" at 620.03,1451.36 h93 r90
  text "32" at 3570.25,1380.22 h93
  text "33" at 3931.01,1380.22 h93
  text "34" at 3570.25,1280.22 h93
  text "35" at 3931.01,1280.22 h93
  text "ISP1_1" at 2183.94,1202 h93
  text "ISP1_2" at 2661.01,1201.48 h93
  text "36" at 3567.49,1180.22 h93
  text "37" at 3931.01,1180.22 h93
  text "ISP1_4" at 2661.01,1102 h93
  text "ISP1_3" at 2182.91,1101.48 h93
  text "38" at 3569.56,1080.22 h93
  text "39" at 3931.01,1080.22 h93
  text "USB1_5V+" at 371.01,1025.72 h93 r90
  text "USB1_GND" at 281.01,1023.31 h93 r90
  text "ISP1_5" at 2182.91,1002 h93
  text "ISP1_6" at 2661.01,1001.48 h93
  text "40" at 3570.42,980.22 h93
  text "41" at 3931.18,979.53 h93
  text "43" at 3931.18,880.22 h93
  text "42" at 3571.11,879.01 h93
  text "45" at 3931.18,781.42 h93
  text "44" at 3571.11,780.22 h93
  text "46" at 3568.35,680.22 h93
  text "47" at 3931.18,680.22 h93
  text "48" at 3570.42,580.22 h93
  text "49" at 3931.18,580.22 h93
  text "51" at 3931.01,480.73 h93
  text "50" at 3569.56,480.22 h93
  text "DC_Vin-" at 261.01,450.5 h93 r90
  text "DC_Vin+" at 491.01,450.5 h93 r90
  text "52" at 3570.25,380.22 h93
  text "53" at 3931.01,380.22 h93
  text "GND4" at 3478.99,281.51 h93
  text "GND5" at 3931.01,281.51 h93
  text "A2" at 2231.01,-106.98 h93 r90
  text "A4" at 2431.01,-106.98 h93 r90
  text "A7" at 2731.01,-106.98 h93 r90
  text "A0" at 2031.01,-107.67 h93 r90
  text "A1" at 2131.01,-107.67 h93 r90
  text "A8" at 2931.01,-107.67 h93 r90
  text "A3" at 2331.01,-108.7 h93 r90
  text "A5" at 2531.01,-108.7 h93 r90
  text "A6" at 2631.01,-109.73 h93 r90
  text "A9" at 3031.01,-109.56 h93 r90
  text "3V3" at 1431.01,-151.23 h93 r90
  text "A12" at 3331.01,-156.23 h93 r90
  text "A14" at 3531.01,-156.23 h93 r90
  text "A10" at 3131.01,-156.92 h93 r90
  text "A11" at 3231.01,-156.92 h93 r90
  text "A13" at 3431.01,-157.95 h93 r90
  text "A15" at 3631.01,-157.95 h93 r90
  text "VIN" at 1831.01,-163.03 h93 r90
  text "5V_1" at 1531.01,-199.45 h93 r90
  text "GND1" at 1631.01,-202.2 h93 r90
  text "GND2" at 1731.01,-201.52 h93 r90
  text "IOREF" at 1231.01,-252.92 h93 r90
  text "RESET" at 1331.01,-256.45 h93 r90

## Text inside footprints (layer, text, board x,y; h text height)
IC1: tPlace "2" at 511.38,649.69 h49.6 r90; tPlace "1" at 511.01,564.57 h49.6 r90; tPlace "4" at 241.01,775.5 h49.6 r90; tPlace "3" at 511.01,740.69 h49.6 r90
IC3: tDocu "TQFP 100" at 1890.38,1018.86 h49.6; tDocu "R" at 2134.47,1074.37 h37.2
IC4: tPlace "1" at 707.27,1248.45 h49.6 r90